# EAGLE board Pong_Layout_v3 (EAGLE 9.7.0)
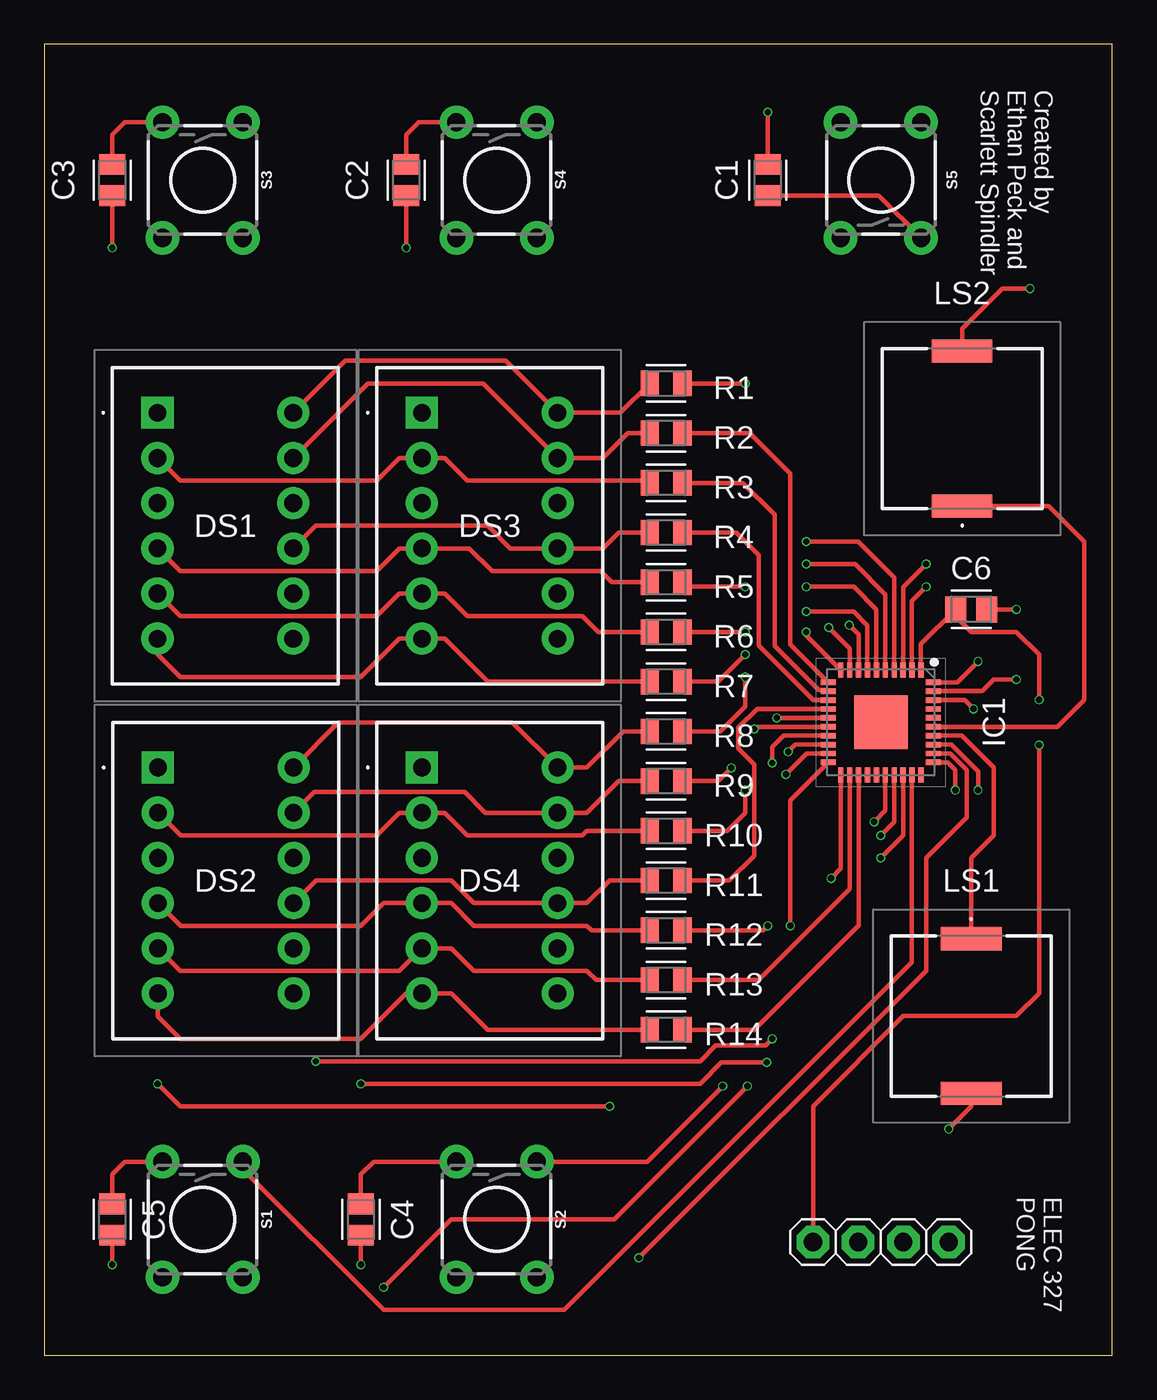
[diagram p0: board, top side]
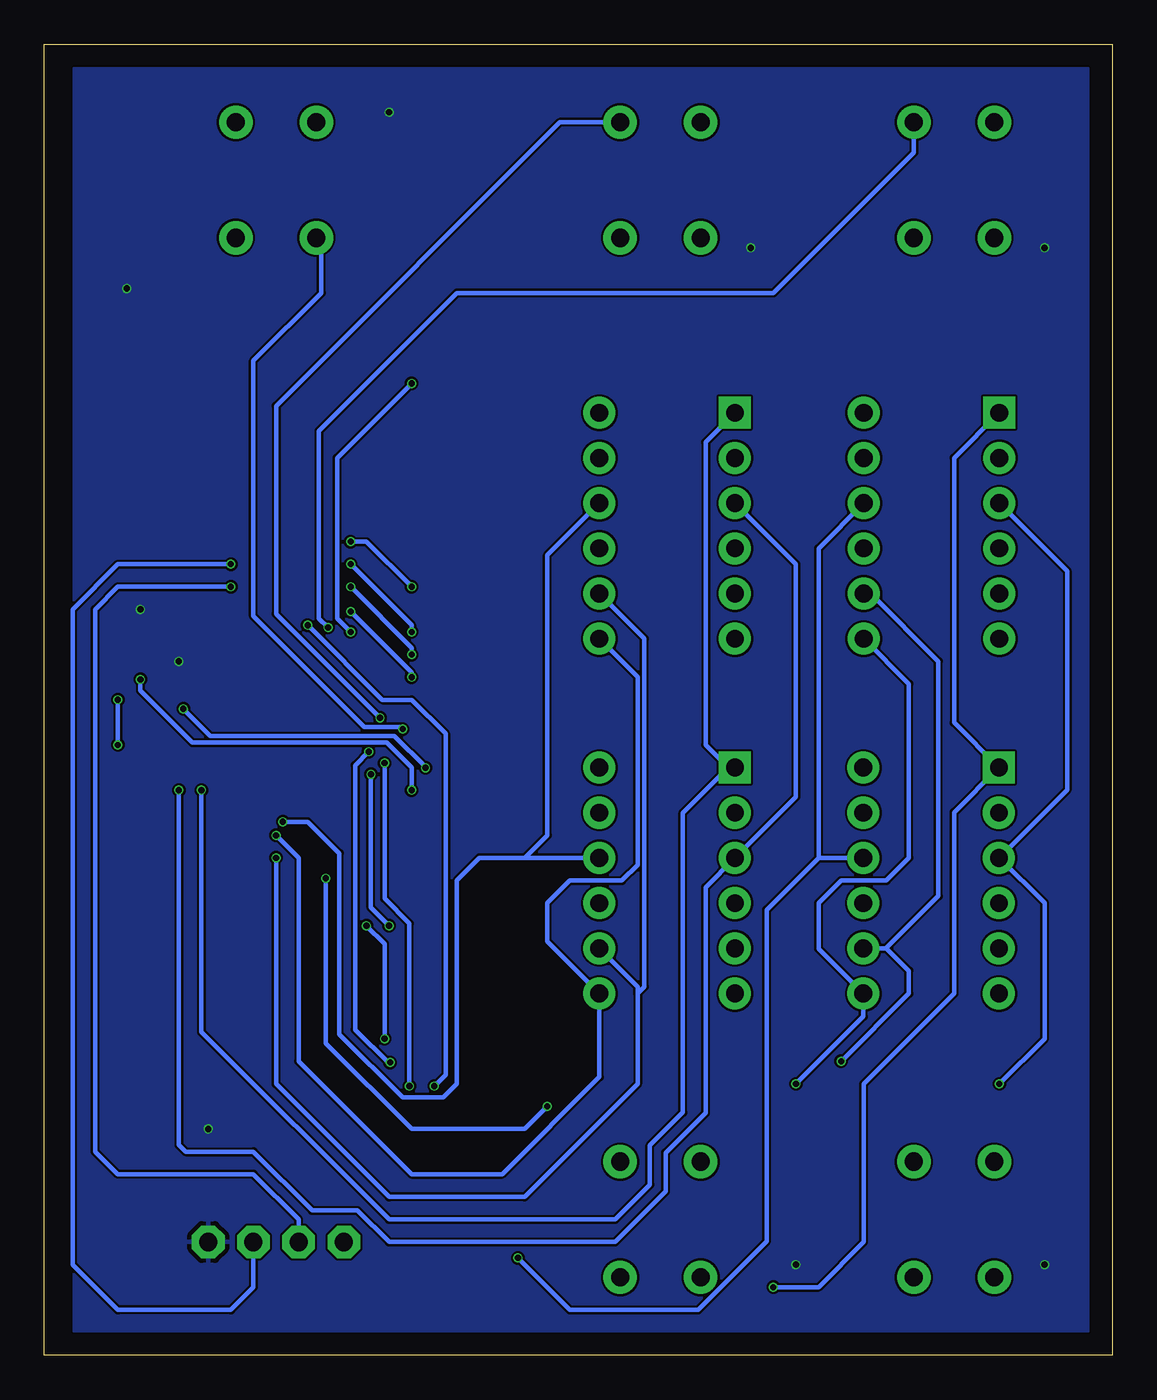
[diagram p1: board, bottom side, seen from below]

Size 60 x 73.66 mm. Coordinates in mm from the lower left corner, seen from the top.
Outline: 0,0 60,0 60,73.66 0,73.66 0,0
Copper layers (1*16): Top 0.035mm / dielectric 1.6mm / Bottom 0.035mm
Design rules "jlcpcb-2layers": minimum track width 5mil, minimum drill 0.3mm, track to track 5mil, track to pad 5mil, pad to pad 5mil, via to via 5mil, smd to smd 5mil, copper to edge 0.2mm, drill to drill 6mil, minimum pad ring 10mil, minimum via ring 3mil, stop-mask expansion 4mil, vias tented up to drill 0mil, thermal gap 10mil

## Footprints (pad centres in the part's own frame; a part is rotated, then mirrored left to right if it is on the bottom)
CAPC2012X110 = smd 1.165 x 1.465: 1 -0.875,0; 2 0.875,0
TC0711YWA = drill 1 pad 1.5 square: 1 0,0 | drill 1 pad 1.5: 2 0,-2.54; 3 0,-5.08; 4 0,-7.62; 5 0,-10.16; 6 0,-12.7; 7 7.62,-12.7; 8 7.62,-10.16; 9 7.62,-7.62; 10 7.62,-5.08; 11 7.62,-2.54; 12 7.62,0
QFN50P600X600X100-41N = smd 0.85 x 0.3: 1 -2.95,2.25; 2 -2.95,1.75; 3 -2.95,1.25; 4 -2.95,0.75; 5 -2.95,0.25; 6 -2.95,-0.25; 7 -2.95,-0.75; 8 -2.95,-1.25; 9 -2.95,-1.75; 10 -2.95,-2.25; 21 2.95,-2.25; 22 2.95,-1.75; 23 2.95,-1.25; 24 2.95,-0.75; 25 2.95,-0.25; 26 2.95,0.25; 27 2.95,0.75; 28 2.95,1.25; 29 2.95,1.75; 30 2.95,2.25 | smd 0.3 x 0.85: 11 -2.25,-2.95; 12 -1.75,-2.95; 13 -1.25,-2.95; 14 -0.75,-2.95; 15 -0.25,-2.95; 16 0.25,-2.95; 17 0.75,-2.95; 18 1.25,-2.95; 19 1.75,-2.95; 20 2.25,-2.95; 31 2.25,2.95; 32 1.75,2.95; 33 1.25,2.95; 34 0.75,2.95; 35 0.25,2.95; 36 -0.25,2.95; 37 -0.75,2.95; 38 -1.25,2.95; 39 -1.75,2.95; 40 -2.25,2.95 | smd 3 x 3: 41 0,0
1X01 = drill 1.016 octagon: 1 0,0
PKMCS0909E4000R1 = smd 1.3 x 3.4: 1 -4.35,0; 2 4.35,0
RESC2012X65 = smd 1.031 x 1.42: 1 -0.919,0; 2 0.919,0
TACTILE_SWITCH_PTH_6.0MM = drill 1.016 pad 1.88: 1 -3.251,2.261; 2 3.251,2.261; 3 -3.251,-2.261; 4 3.251,-2.261

## Placement (x,y rotation side)
C1  [CAPC2012X110]  40.64,66.04 90 top
C2  [CAPC2012X110]  20.32,66.04 270 top
C3  [CAPC2012X110]  3.81,66.04 270 top
C4  [CAPC2012X110]  17.78,7.62 270 top
C5  [CAPC2012X110]  3.81,7.62 270 top
C6  [CAPC2012X110]  52.07,41.91 0 top
DS1  TC07-11YWA  [TC0711YWA]  6.35,52.96 0 top
DS2  TC07-11YWA  [TC0711YWA]  6.37,33.02 0 top
DS3  TC07-11YWA  [TC0711YWA]  21.21,52.96 0 top
DS4  TC07-11YWA  [TC0711YWA]  21.21,33.02 0 top
IC1  MSP430FR2475TRHAR  [QFN50P600X600X100-41N]  46.99,35.56 270 top
JP1  PINHD-1X1  [1X01]  43.18,6.35 180 top
JP2  PINHD-1X1  [1X01]  45.72,6.35 180 top
JP3  PINHD-1X1  [1X01]  48.26,6.35 180 top
JP4  PINHD-1X1  [1X01]  50.8,6.35 180 top
LS1  PKMCS0909E4000-R1  [PKMCS0909E4000R1]  52.07,19.05 270 top
LS2  PKMCS0909E4000-R1  [PKMCS0909E4000R1]  51.56,52.07 90 top
R1  [RESC2012X65]  34.92,54.61 0 top
R2  [RESC2012X65]  34.92,51.82 0 top
R3  [RESC2012X65]  34.92,49.02 0 top
R4  [RESC2012X65]  34.92,46.23 0 top
R5  [RESC2012X65]  34.92,43.43 0 top
R6  [RESC2012X65]  34.92,40.64 0 top
R7  [RESC2012X65]  34.92,37.85 0 top
R8  [RESC2012X65]  34.92,35.05 0 top
R9  [RESC2012X65]  34.92,32.26 0 top
R10  [RESC2012X65]  34.92,29.46 0 top
R11  [RESC2012X65]  34.92,26.67 0 top
R12  [RESC2012X65]  34.92,23.88 0 top
R13  [RESC2012X65]  34.92,21.08 0 top
R14  [RESC2012X65]  34.92,18.29 0 top
S1  MOMENTARY-SWITCH-SPST-PTH-6.0MM  [TACTILE_SWITCH_PTH_6.0MM]  8.89,7.62 270 top
S2  MOMENTARY-SWITCH-SPST-PTH-6.0MM  [TACTILE_SWITCH_PTH_6.0MM]  25.4,7.62 270 top
S3  MOMENTARY-SWITCH-SPST-PTH-6.0MM  [TACTILE_SWITCH_PTH_6.0MM]  8.89,66.04 270 top
S4  MOMENTARY-SWITCH-SPST-PTH-6.0MM  [TACTILE_SWITCH_PTH_6.0MM]  25.4,66.04 270 top
S5  MOMENTARY-SWITCH-SPST-PTH-6.0MM  [TACTILE_SWITCH_PTH_6.0MM]  46.99,66.04 90 top

## Library data of the parts
C1-C6 = Capacitor; CATEGORY: Capacitor
DS1-DS4 = TC07-11YWA; DESCRIPTION: LED Displays & Accessories Dot Matrix Yel 588nm Common Cathode; HEIGHT: 6.65mm; MANUFACTURER_NAME: Kingbright; MANUFACTURER_PART_NUMBER: TC07-11YWA; MOUSER_PART_NUMBER: 604-TC07-11YWA; MOUSER_PRICE-STOCK: https://www.mouser.com/Search/Refine.aspx?Keyword=604-TC07-11YWA
IC1 = Library; DESCRIPTION: MCU 16-bit MSP430 RISC 32.5KB FRAM 3.3V 40-Pin VQFN EP T/R; HEIGHT: 1mm; MANUFACTURER_NAME: Texas Instruments; MANUFACTURER_PART_NUMBER: MSP430FR2475TRHAR; MOUSER_PART_NUMBER: 595-SP430FR2475TRHAR; MOUSER_PRICE-STOCK: https://www.mouser.co.uk/ProductDetail/Texas-Instruments/MSP430FR2475TRHAR?qs=vLWxofP3U2x%252BBxUsAGdh%2Fw%3D%3D
JP1-JP4 = Connector; CATEGORY: CONNECTOR; SUB-CATEGORY: PIN-HEADER
LS1 LS2 = PKMCS0909E4000-R1; DESCRIPTION: Piezo Buzzer 9x9mm 4kHz 1.9mm Murata Maximum of +/-12.5 V 65dB SMD Sounder External Piezo Buzzer, Maximum of 4 kHz; HEIGHT: 1.9mm; MANUFACTURER_NAME: Murata Electronics; MANUFACTURER_PART_NUMBER: PKMCS0909E4000-R1; MOUSER_PART_NUMBER: 81-PKMCS0909E4000-R1; MOUSER_PRICE-STOCK: https://www.mouser.co.uk/ProductDetail/Murata-Electronics/PKMCS0909E4000-R1?qs=YqJ97pz8ambMt2Tf4F1Kig%3D%3D
R1-R14 = Resistor; CATEGORY: Resistor; SUB-CATEGORY: Fixed
S1-S5 = SparkFun-Switches; PROD_ID: SWCH-08441; SF_SKU: COM-00097

## Nets
BTN1: IC1.29 S1.1
BTN2: IC1.8 S2.1
BTN3: IC1.9 S3.1
BTN4: IC1.15 S4.1
BTN5: IC1.16 S5.1
COL_1: DS1.1 DS2.1 IC1.17
COL_2: DS1.3 DS2.3 IC1.21
COL_3: DS1.10 DS2.10 IC1.32
COL_4: DS1.7 DS2.7 IC1.18
COL_5: DS1.8 DS2.8 IC1.20
COL_6: DS3.1 DS4.1 IC1.31
COL_7: DS3.3 DS4.3 IC1.33
COL_8: DS3.10 DS4.10 IC1.26
COL_9: DS3.7 DS4.7 IC1.27
COL_10: DS3.8 DS4.8 IC1.28
DVCC: C6.1 IC1.1 JP1.1
G_AUD: IC1.35 LS2.1
GND: C1.2 C2.2 C3.2 C4.2 C5.2 C6.2 IC1.40 JP4.1 LS1.2 LS2.2
M_AUD: IC1.34 LS1.1
N$1: IC1.10 R1.2
N$2: IC1.11 R2.2
N$3: IC1.12 R3.2
N$4: IC1.13 R4.2
N$5: IC1.4 R5.2
N$6: IC1.5 R6.2
N$7: IC1.6 R7.2
N$8: IC1.7 R8.2
N$9: IC1.38 R9.2
N$10: IC1.39 R10.2
N$11: IC1.14 R11.2
N$12: IC1.19 R12.2
N$13: IC1.22 R13.2
N$14: IC1.23 R14.2
N$18: C1.1 S5.3
N$19: C2.1 S4.3
N$20: C3.1 S3.3
N$21: C4.1 S2.3
N$22: C5.1 S1.3
ROW_1: DS1.12 DS3.12 R1.1
ROW_2: DS1.11 DS3.11 R2.1
ROW_3: DS1.2 DS3.2 R3.1
ROW_4: DS1.9 DS3.9 R4.1
ROW_5: DS1.4 DS3.4 R5.1
ROW_6: DS1.5 DS3.5 R6.1
ROW_7: DS1.6 DS3.6 R7.1
ROW_8: DS2.12 DS4.12 R8.1
ROW_9: DS2.11 DS4.11 R9.1
ROW_10: DS2.2 DS4.2 R10.1
ROW_11: DS2.9 DS4.9 R11.1
ROW_12: DS2.4 DS4.4 R12.1
ROW_13: DS2.5 DS4.5 R13.1
ROW_14: DS2.6 DS4.6 R14.1
SBWTCK: IC1.3 JP3.1
SBWTDIO: IC1.2 JP2.1

## Tracks (layer width: path | path; a pad name or v marks a point on that pad's centre or on a via)
BTN1
  Top 0.254: IC1.29 48.74,22.07 29.21,2.54 19.05,2.54 11.15,10.44 S1.1
BTN2  (via drill 0.35)
  Top 0.254: IC1.8 45.74,40.49 v45.21,41.02 | v38.1,15.11 33.86,10.87 S2.1
  Bottom 0.254: v45.21,41.02 41.02,36.83 39.37,36.83 37.47,34.92 37.47,15.75 v38.1,15.11
BTN3  (via drill 0.35)
  Top 0.254: IC1.9 45.24,39.72 v44.07,40.89
  Bottom 0.254: v44.07,40.89 44.58,41.4 44.58,51.94 36.83,59.69 19.05,59.69 11.15,67.59 S3.1
BTN4  (via drill 0.35)
  Top 0.254: v41.15,35.81 IC1.15
  Bottom 0.254: S4.1 31.04,69.29 46.99,53.34 46.99,41.66 v41.15,35.81
BTN5  (via drill 0.35)
  Top 0.254: IC1.16 40.01,35.31 v39.88,35.18
  Bottom 0.254: v39.88,35.18 40.01,35.31 42.04,35.31 48.26,41.53 48.26,55.88 44.45,59.69 44.45,62.51 S5.1
COL_1  (via drill 0.35)
  Top 0.254: IC1.17 41.54,34.81 40.89,34.16 v40.89,33.27 | v39.5,15.11 32,7.62 22.86,7.62 v19.05,3.81
  Bottom 0.254: DS1.1 8.89,50.42 8.89,35.54 DS2.1 8.89,30.5 8.89,20.32 13.97,15.24 13.97,6.35 16.51,3.81 v19.05,3.81 | v40.89,33.27 40.89,25.65 39.5,24.26 v39.5,15.11
COL_2  (via drill 0.35)
  Top 0.254: IC1.21 44.74,27.34 v44.2,26.8 | v31.75,13.97 7.62,13.97 v6.35,15.24
  Bottom 0.254: DS1.3 2.54,44.07 2.54,31.77 6.36,27.95 | 6.36,27.95 DS2.3 | v44.2,26.8 44.2,17.53 39.37,12.7 33.02,12.7 v31.75,13.97 | v6.35,15.24 3.81,17.78 3.81,25.4 6.36,27.95
COL_3  (via drill 0.35)
  Top 0.254: IC1.32 50.9,33.81 51.82,32.89 51.82,30.23 49.53,27.94 49.53,21.59 v33.4,5.46
  Bottom 0.254: 16.51,27.94 16.51,45.34 DS1.10 | v33.4,5.46 30.48,2.54 23.28,2.54 19.42,6.4 19.42,25.03 16.51,27.94 | 16.51,27.94 DS2.10
COL_4  (via drill 0.35)
  Top 0.254: IC1.18 42.18,34.31 v41.78,33.91 | v40.58,16.45 38.04,16.45 36.83,15.24 v17.78,15.24
  Bottom 0.254: DS1.7 11.43,37.72 11.43,27.94 12.7,26.67 15.24,26.67 16.51,25.4 16.51,22.84 DS2.7 13.99,19.03 v17.78,15.24 | v41.78,33.91 42.55,33.15 42.55,18.29 40.64,16.38 v40.58,16.45
COL_5  (via drill 0.35)
  Top 0.254: IC1.20 41.91,31.18 v41.91,24.13 | v40.89,17.78 40.51,17.4 37.72,17.4 36.83,16.51 v15.24,16.51
  Bottom 0.254: DS1.8 13.59,42.8 9.78,38.99 9.78,25.8 12.72,22.86 DS2.8 12.7,22.86 11.43,21.59 11.43,20.32 v15.24,16.51 | v41.91,24.13 40.89,23.11 v40.89,17.78
COL_6  (via drill 0.35)
  Top 0.254: IC1.31 50.76,33.31 51.18,32.89 v51.18,31.75
  Bottom 0.254: DS3.1 22.86,51.31 22.86,34.29 21.59,33.02 | v51.18,31.75 51.18,18.16 40.64,7.62 27.94,7.62 25.98,9.58 25.98,11.78 24.13,13.63 24.13,30.48 21.59,33.02 | 21.59,33.02 DS4.1
COL_7  (via drill 0.35)
  Top 0.254: v52.45,31.75 52.45,32.8 50.94,34.31 IC1.33
  Bottom 0.254: DS3.3 17.78,44.45 17.78,31.37 DS4.3 22.86,26.29 22.86,13.6 25.09,11.37 25.09,9.2 27.94,6.35 40.64,6.35 42.42,8.13 44.96,8.13 48.26,11.43 52.07,11.43 52.45,11.81 v52.45,31.75
COL_8  (via drill 0.35)
  Top 0.254: IC1.26 47.24,30.6 v46.61,29.97
  Bottom 0.254: DS4.10 33.02,27.94 | 33.02,27.94 35.56,27.94 36.83,26.67 36.83,15.24 37.59,14.48 39.88,14.48 43.43,18.03 43.43,28.19 45.21,29.97 v46.61,29.97 | 33.02,27.94 31.75,29.21 31.75,44.96 DS3.10
COL_9  (via drill 0.35)
  Top 0.254: IC1.27 47.74,29.96 v46.99,29.21
  Bottom 0.254: v46.99,29.21 45.72,27.94 45.72,16.51 39.37,10.16 34.29,10.16 28.83,15.62 DS4.7 31.75,23.24 31.75,25.4 30.48,26.67 27.56,26.67 26.67,27.56 26.67,38.1 DS3.7
COL_10  (via drill 0.35)
  Top 0.254: IC1.28 48.24,29.19 v46.99,27.94
  Bottom 0.254: v46.99,27.94 46.99,15.24 40.64,8.89 33.02,8.89 26.67,15.24 26.67,20.32 | 26.67,20.32 26.67,20.7 DS4.8 | 26.67,20.32 26.29,20.7 26.29,40.26 DS3.8
DVCC  (via drill 0.35)
  Top 0.254: IC1.1 49.24,39.95 C6.1 51.2,41.52 52.07,40.64 54.61,40.64 55.88,39.37 v55.88,36.83 | v55.88,34.29 55.88,20.32 54.61,19.05 48.26,19.05 43.18,13.97 JP1.1
  Bottom 0.254: v55.88,36.83 v55.88,34.29
G_AUD
  Top 0.254: IC1.35 56.9,35.31 58.42,36.83 58.42,45.72 56.42,47.72 LS2.1
GND  (via drill 0.35)
  Top 0.254: C6.2 v54.61,41.91 | IC1.40 51.27,37.81 v52.45,38.99 | C4.2 v17.78,5.08 | C5.2 v3.81,5.08 | v55.37,59.94 53.82,59.94 51.56,57.69 LS2.2 | C1.2 v40.64,69.85 | C3.2 v3.81,62.23 | C2.2 v20.32,62.23 | LS1.2 52.07,13.97 v50.8,12.7
  pour Bottom: 1.35,1.35 58.34,1.35 58.34,72.31 1.35,72.31
M_AUD
  Top 0.254: LS1.1 52.07,27.94 53.34,29.21 53.34,33.02 51.55,34.81 IC1.34
N$1  (via drill 0.35)
  Top 0.254: IC1.10 42.8,40.45 v42.8,40.64 | v39.37,54.61 R1.2
  Bottom 0.254: v42.8,40.64 43.56,41.4 43.56,50.42 v39.37,54.61
N$2
  Top 0.254: IC1.11 41.91,39.94 41.91,49.53 39.62,51.82 R2.2
N$3
  Top 0.254: IC1.12 43.97,37.38 43.5,37.38 41.02,39.86 41.02,47.24 39.24,49.02 R3.2
N$4
  Top 0.254: IC1.13 44.02,36.83 43.18,36.83 40.13,39.88 40.13,44.96 38.86,46.23 R4.2
N$5  (via drill 0.35)
  Top 0.254: IC1.4 47.74,43.7 45.72,45.72 v42.8,45.72 | v39.37,43.18 36.1,43.18 R5.2
  Bottom 0.254: v42.8,45.72 41.91,45.72 v39.37,43.18
N$6  (via drill 0.35)
  Top 0.254: v42.8,44.45 45.54,44.45 47.24,42.75 IC1.5 | v39.37,40.64 R6.2
  Bottom 0.254: v42.8,44.45 39.37,41.02 v39.37,40.64
N$7  (via drill 0.35)
  Top 0.254: IC1.6 46.74,41.91 45.47,43.18 v42.8,43.18 | v39.37,39.37 37.85,37.85 R7.2
  Bottom 0.254: v42.8,43.18 39.37,39.75 v39.37,39.37
N$8  (via drill 0.35)
  Top 0.254: IC1.7 46.24,41.01 45.47,41.78 v42.8,41.78 | v39.37,38.1 39.37,36.45 37.97,35.05 R8.2
  Bottom 0.254: v42.8,41.78 39.37,38.35 v39.37,38.1
N$9  (via drill 0.35)
  Top 0.254: IC1.38 51.71,36.81 v52.2,36.32 | R9.2 37.85,32.26 v38.59,33
  Bottom 0.254: v52.2,36.32 50.68,34.8 40.34,34.8 38.59,33.05 v38.59,33
N$10  (via drill 0.35)
  Top 0.254: IC1.39 52.68,37.31 53.34,37.97 v54.61,37.97 | v39.37,31.75 39.37,30.48 38.35,29.46 R10.2
  Bottom 0.254: v54.61,37.97 54.61,37.34 51.69,34.41 40.76,34.41 39.37,33.02 v39.37,31.75
N$11
  Top 0.254: R11.2 38.48,26.67 39.88,28.06 39.88,33.2 38.99,34.08 38.99,35.26 40.05,36.32 41.36,36.32 41.37,36.31 IC1.14
N$12  (via drill 0.35)
  Top 0.254: IC1.19 42.83,33.81 v41.66,32.64 | v40.64,24.13 40.39,23.88 R12.2
  Bottom 0.254: v41.66,32.64 41.66,25.15 v40.64,24.13
N$13
  Top 0.254: IC1.22 45.24,26.19 40.13,21.08 R13.2
N$14
  Top 0.254: IC1.23 45.74,24.15 39.88,18.29 R14.2
N$18
  Top 0.254: S5.3 46.88,65.17 C1.1
N$19
  Top 0.254: S4.3 21.03,69.29 20.32,68.58 C2.1
N$20
  Top 0.254: C3.1 3.81,68.58 4.52,69.29 S3.3
N$21
  Top 0.254: S2.3 18.49,10.87 17.78,10.16 C4.1
N$22
  Top 0.254: S1.3 4.52,10.87 3.81,10.16 C5.1
ROW_1
  Top 0.254: R1.1 32.35,52.96 DS3.12 25.91,55.88 16.89,55.88 DS1.12
ROW_2
  Top 0.254: R2.1 32.77,51.82 31.37,50.42 DS3.11 24.64,54.61 18.16,54.61 DS1.11
ROW_3
  Top 0.254: R3.1 33.88,49.15 23.75,49.15 22.48,50.42 DS3.2 19.94,50.42 18.67,49.15 7.62,49.15 DS1.2
ROW_4
  Top 0.254: R4.1 32.26,46.23 31.37,45.34 DS3.9 26.16,45.34 24.89,46.61 15.24,46.61 DS1.9
ROW_5
  Top 0.254: DS1.4 7.62,44.07 18.67,44.07 19.94,45.34 DS3.4 23.88,45.34 25.15,44.07 31.24,44.07 31.88,43.43 R5.1
ROW_6
  Top 0.254: DS1.5 7.62,41.53 18.67,41.53 19.94,42.8 DS3.5 22.48,42.8 23.75,41.53 30.23,41.53 31.11,40.64 R6.1
ROW_7
  Top 0.254: R7.1 24.89,37.85 22.48,40.26 DS3.6 19.94,40.26 17.78,38.1 7.62,38.1 6.35,39.37 DS1.6
ROW_8
  Top 0.254: R8.1 32.51,35.05 30.48,33.02 DS4.12 26.29,35.56 16.51,35.56 16.51,35.54 DS2.12
ROW_9
  Top 0.254: R9.1 32.26,32.26 30.48,30.48 DS4.11 24.77,30.48 23.61,31.63 15.15,31.63 DS2.11
ROW_10
  Top 0.254: R10.1 30.48,29.46 30.23,29.21 23.75,29.21 22.48,30.48 DS4.2 19.94,30.48 18.67,29.21 7.64,29.21 DS2.2
ROW_11
  Top 0.254: R11.1 31.75,26.67 30.48,25.4 DS4.9 24.13,25.4 22.86,26.67 15.26,26.67 DS2.9
ROW_12
  Top 0.254: R12.1 30.73,23.88 30.48,24.13 24.13,24.13 22.86,25.4 DS4.4 19.05,25.4 17.78,24.13 7.64,24.13 DS2.4
ROW_13
  Top 0.254: R13.1 30.99,21.08 30.48,21.59 24.13,21.59 22.86,22.86 DS4.5 19.94,21.59 7.62,21.59 6.37,22.84 DS2.5
ROW_14
  Top 0.254: R14.1 24.89,18.29 22.86,20.32 DS4.6 20.32,20.32 17.78,17.78 7.62,17.78 6.37,19.03 DS2.6
SBWTCK  (via drill 0.35)
  Top 0.254: IC1.3 48.24,43.16 v49.53,44.45
  Bottom 0.254: v49.53,44.45 55.88,44.45 58.42,41.91 58.42,5.08 55.88,2.54 49.53,2.54 48.26,3.81 JP3.1
SBWTDIO  (via drill 0.35)
  Top 0.254: IC1.2 48.74,42.39 v49.53,43.18
  Bottom 0.254: v49.53,43.18 55.88,43.18 57.15,41.91 57.15,11.43 55.88,10.16 48.26,10.16 45.72,7.62 JP2.1

## Text on the board
tNames: Created by / Ethan Peck and / Scarlett Spindler | ELEC 327 / PONG